# Altium PCB STM32F103RET6.PcbDoc
Units mm, origin at the board's own origin, x right, y up, seen from the top; angles counter-clockwise.
Board outline 50.2 x 95.7 mm, 2 copper layers (Top Layer, Bottom Layer); 61 components, 81 nets, 286 pads, 113 vias.
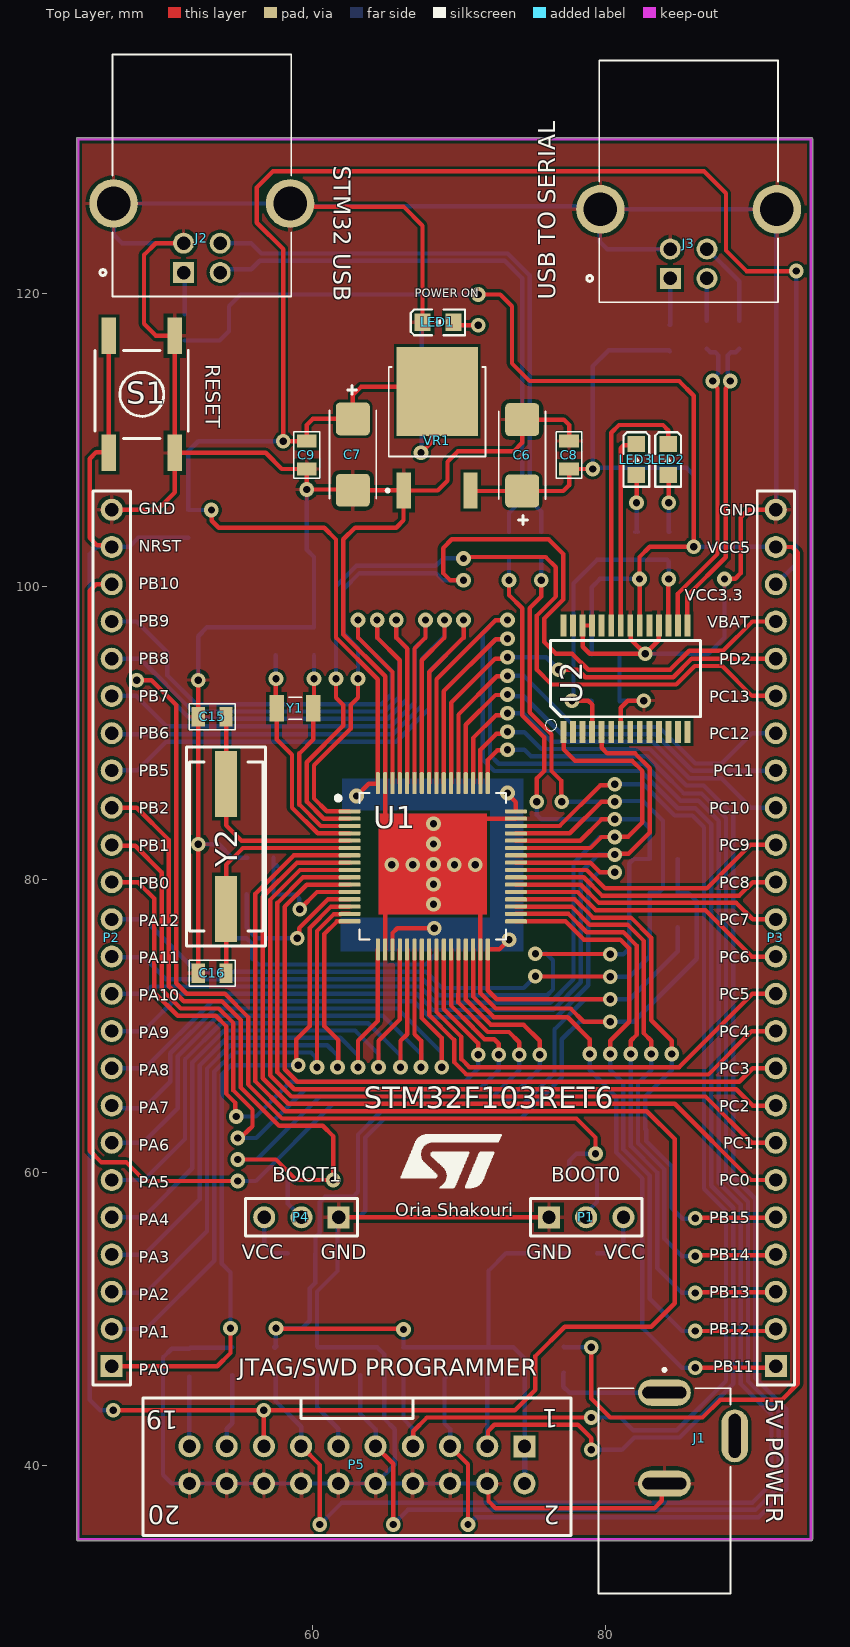
[diagram p0: Top Layer view]
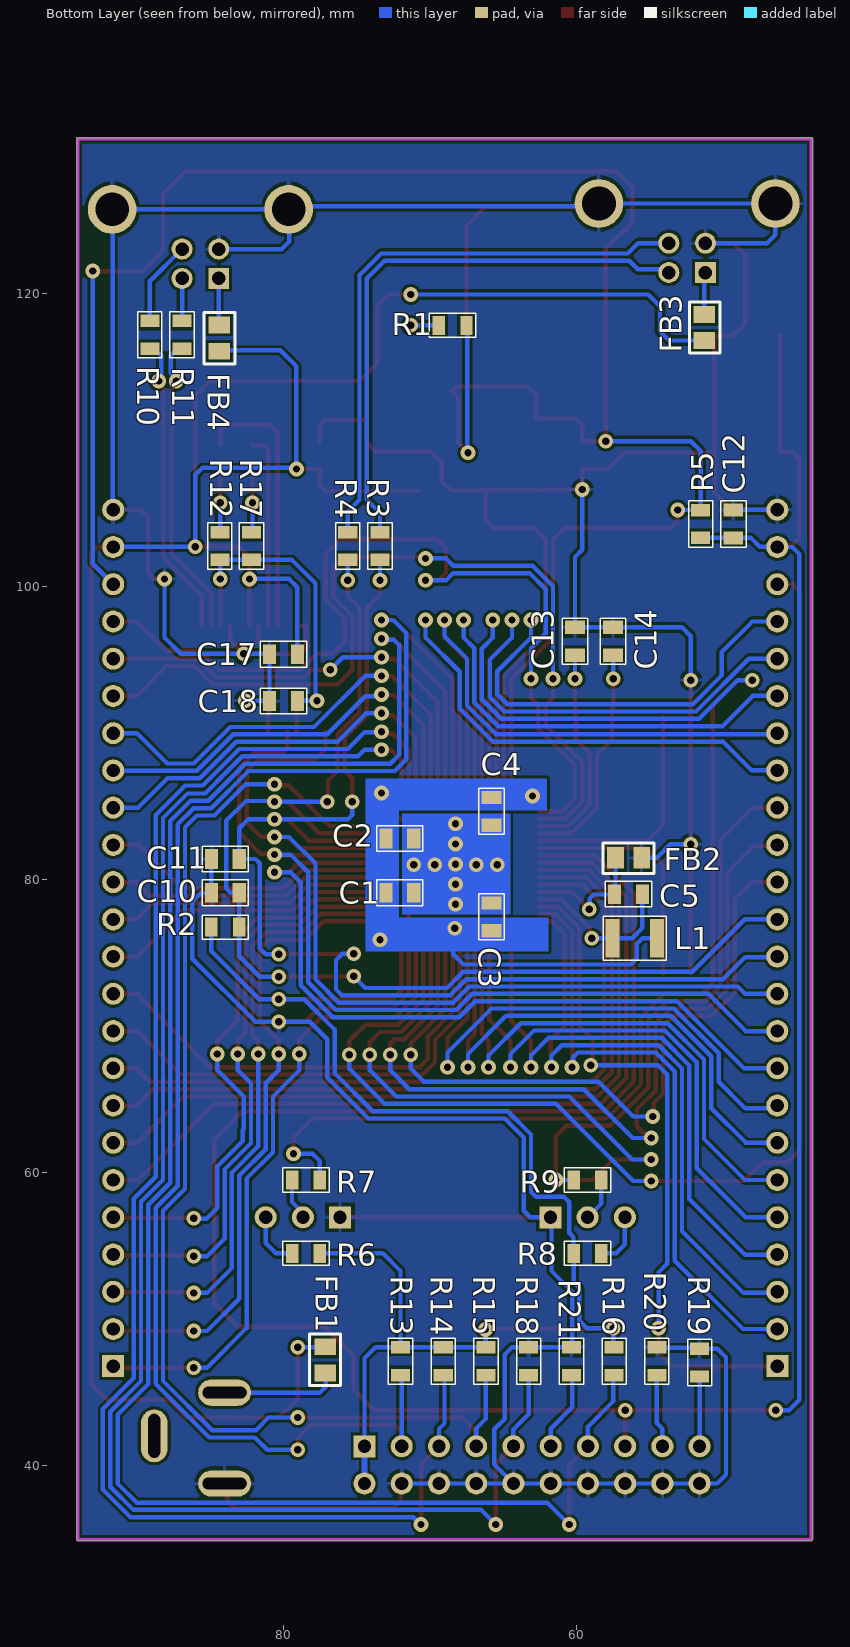
[diagram p1: Bottom Layer view, seen from below]

## Layer stack, top to bottom
Top Solder: solder mask 0.0102, Solder Resist, Dk 3.5
Top Layer: signal copper 0.0356
Dielectric 1: dielectric 0.32, FR-4, Dk 4.8
Bottom Layer: signal copper 0.0356
Bottom Solder: solder mask 0.0102, Solder Resist, Dk 3.5

## Board outline
43.9,35 43.9,130.5 cw(c44,130.5) 44,130.6 94,130.6 cw(c94,130.5) 94.1,130.5 94.1,35 cw(c94,35) 94,34.9 44.003,34.9 cw(c44,35)

## Design rules (kind name [scope] priority, off if disabled: settings)
Clearance [All] p1: gap=0.2 ignorepadtopadclearanceinfootprint=FALSE
DiffPairsRouting [All] p1: maxlimit=0.254 minlimit=0.2 mostfreqgap=0.2 toplayer_minwidth=0.3 toplayer_maxwidth=0.3 toplayer_prefwidth=0.3 bottomlayer_minwidth=0.3 bottomlayer_maxwidth=0.3 bottomlayer_prefwidth=0.3 maxuncoupledlength=12.7
PolygonConnect [All] p1: connectstyle=Relief reliefconductorwidth=0.254 reliefentries=4 polygonreliefangle="90 Angle" airgapwidth=0.254
RoutingVias [All] p1: holewidth=0.5 width=1 viastyle="Through Hole" minholewidth=0.5 minwidth=1 maxholewidth=0.5 maxwidth=1
SolderMaskExpansion [All] p1: expansion=0.102 istentingtop=FALSE
Width [All] p1: maxlimit=1 minlimit=0.3 preferedwidth=0.5
29 further rules are at their usual default settings.

## Classes and differential pairs
differential pair D: +D_P -D_N

## Components (designator, comment, footprint, x,y, rotation, side; value= is the part's Value field where it differs from the comment)
C1 "100nF" CAP0805 65.736,81.76 r0 bottom
C2 "100nF" CAP0805 65.736,85.46 r0 bottom
C3 "100nF" CAP0805 68.46,83.764 r270 bottom
C4 "100nF" CAP0805 63.14,78.336 r90 bottom
C5 "100nF" CAP0805 62.764,76.34 r180 bottom
C6 "47uF" CAP_TANTALIUM_SIZEC 74.046,109.316 r90 top
C7 "47uF" CAP_TANTALIUM_SIZEC 63,108.6 r270 top
C8 "100nF" CAP0805 74.84,115.264 r270 top
C9 "100nF" CAP0805 62.26,102.636 r90 top
C10 "47pF" CAP0805 90.264,76.44 r180 bottom
C11 "47pF" CAP0805 90.264,78.74 r180 bottom
C12 "100nF" CAP0805 51.96,110.564 r270 bottom
C13 "18pF" CAP0805 57.44,89.936 r90 bottom
C14 "18pF" CAP0805 54.84,89.936 r90 bottom
C15 "18pF" CAP0805 59.464,93.76 r180 top
C16 "18pF" CAP0805 59.464,76.26 r180 top
C17 "100nF" CAP0805 86.301,92.705 r180 bottom
C18 "100nF" CAP0805 86.301,89.505 r180 bottom
FB1 "Ferrite Bead" ferritebead_0805 77,47.489 r90 bottom value=10mH
FB2 "Ferrite Bead" ferritebead_0805 56.7,81.6 r0 bottom value=10mH
FB3 "Ferrite Bead" ferritebead_0805 51.4,117.4 r270 bottom value=10mH
FB4 "Ferrite Bead" ferritebead_0805 84.5,116.675 r270 bottom value=10mH
J1 "PJ-035C" PJ-035C 82.349,42.714 r0 top
J2 "UJ2-BH-4-TH" "USB_TYPE B_2.0" 52.47,128.893 r180 top
J3 "UJ2-BH-4-TH" "USB_TYPE B_2.0" 85.67,128.493 r180 top
L1 "10uH" IND1210 52.889,79.082 r0 bottom
LED1 "LED_SMD_0805" LED_SMD_0805 71.267,117.459 r0 top
LED2 "LED_SMD_0805" LED_SMD_0805 83.709,105.929 r270 top
LED3 "LED_SMD_0805" LED_SMD_0805 81.547,105.929 r270 top
P1 "BOOT0" "Header 3" 58.213,40.069 r0 top
P2 "Header 24" HEADER24 46.3,79.693 r0 top
P3 "Header 24" HEADER24 91.599,79.693 r0 top
P4 "BOOT1" "Header 3" 79.687,73.851 r180 top
P5 "IDC 10X2" "IDC 10X2" 147.612,87.06 r180 top
R1 "1K" RES0805 72.137,115.487 r180 bottom
R2 "1.5K" RES0805 87.637,74.437 r180 bottom
R3 "22" RES0805 71.087,99.063 r90 bottom
R4 "22" RES0805 77.913,106.437 r270 bottom
R5 "10K" RES0805 49.212,100.563 r90 bottom
R6 "100" RES0805 74.763,56.813 r0 bottom
R7 "10K" RES0805 74.763,61.813 r0 bottom
R8 "100" RES0805 62.937,52.187 r180 bottom
R9 "10K" RES0805 62.937,57.187 r180 bottom
R10 "22" RES0805 91.413,120.837 r270 bottom
R11 "22" RES0805 89.213,120.837 r270 bottom
R12 "270" RES0805 82.016,99.063 r90 bottom
R13 "10K" RES0805 74.313,50.837 r270 bottom
R14 "10K" RES0805 71.399,50.837 r270 bottom
R15 "10K" RES0805 68.484,50.837 r270 bottom
R16 "10K" RES0805 59.742,50.837 r270 bottom
R17 "270" RES0805 79.854,99.063 r90 bottom
R18 "10K" RES0805 60.944,43.463 r90 bottom
R19 "10K" RES0805 49.287,43.363 r90 bottom
R20 "10K" RES0805 52.201,43.463 r90 bottom
R21 "10K" RES0805 58.03,43.463 r90 bottom
S1 "RESET" "Push Button Switch SMD" 21.045,141.563 r270 top
U1 "STM32F103RET6" QFP50P1200X1200X160-64N 68.2,80.9 r0 top
U2 "INTERFACE-FT232RL(SSOP28)" FT232RL 80.837,93.065 r0 top
VR1 "LD1117DT33TR" LD1117DT33TR 68.5,108.534 r0 top
Y1 "32768" 32768_crystal 58.9,91.618 r0 top
Y2 "12MHz" "Crystal SMD" 58.649,73.637 r90 top

## Footprints (in the part's own frame and the unit in brackets; to place one, negate y for a bottom-side part, rotate by r counter-clockwise, add the part's x,y. Pads: shape width x height; smd on the part's side, far side on the other; paste and mask are expansions set on the pad)
32768_crystal [mm]
  rect 1x1.8 smd: 1(-1.346,0.058) 2(1.154,0.058)
  silkscreen extent -0.53,-0.69 0.33,0.81, body extent -1.7,-0.69 1.5,0.81, height 0.65
CAP0805 [mm]
  rect 0.9x1.35 smd: 1(5.364,2.66) 2(7.264,2.66)
  silkscreen extent 4.74,1.79 7.89,3.53, body extent 5.29,2.01 7.34,3.31, height 0.5
CAP_TANTALIUM_SIZEC [mm]
  rrect25% 2.24x2.32 smd: 1(-2.816,-0.254) 2(2.054,-0.254)
  silkscreen extent -5.1,-1.85 2.62,1.35, body extent -3.4,-1.8 2.6,1.4, height 2.8
"Crystal SMD" [mm]
  rect 4.5x1.5 smd: 1(4.363,4.549) 2(12.863,4.549)
  silkscreen extent 1.81,1.85 15.41,7.25, body extent 2.4,2.3 14.7,6.8, height 5.18
ferritebead_0805 [mm]
  rect 1.14x1.47 smd: 1(-1.144,0.127) 2(0.636,0.127)
  silkscreen extent -2,-0.9 1.5,1.2, body extent -1.2,-0.53 0.8,0.72, height 1.05
FT232RL [mm]
  rect 0.4x1.5 smd: 1(-3.717,-2.99) 2(-3.067,-2.99) 3(-2.417,-2.99) 4(-1.767,-2.99) 5(-1.117,-2.99) 6(-0.467,-2.99) 7(0.183,-2.99) 8(0.833,-2.99) 9(1.483,-2.99) 10(2.133,-2.99) 11(2.783,-2.99) 12(3.433,-2.99) 13(4.083,-2.99) 14(4.733,-2.99) 15(4.733,4.26) 16(4.083,4.26) 17(3.433,4.26) 18(2.783,4.26) 19(2.133,4.26) 20(1.483,4.26) 21(0.833,4.26) 22(0.183,4.26) 23(-0.467,4.26) 24(-1.117,4.26) 25(-1.767,4.26) 26(-2.417,4.26) 27(-3.067,4.26) 28(-3.717,4.26)
  silkscreen extent -4.95,-2.92 5.61,3.23, body extent -4.59,-3.26 5.61,4.53, height 2
HEADER24 [mm]
  rect 1.5x1.5 hole 0.9: 1(0,-32.893)
  round 1.5 hole 0.9: 2(0,-30.353) 3(0,-27.813) 4(0,-25.273) 5(0,-22.733) 6(0,-20.193) 7(0,-17.653) 8(0,-15.113) 9(0,-12.573) 10(0,-10.033) 11(0,-7.493) 12(0,-4.953) 13(0,-2.413) 14(0,0.127) 15(0,2.667) 16(0,5.207) 17(0,7.747) 18(0,10.287) 19(0,12.827) 20(0,15.367) 21(0,17.907) 22(0,20.447) 23(0,22.987) 24(0,25.527)
  silkscreen extent -1.27,-34.16 1.27,26.8, body extent -1.27,-34.29 1.27,26.67, height 8.38
"Header 3" [mm]
  rect 1.5x1.5 hole 0.9: 1(17.907,16.891)
  round 1.5 hole 0.9: 2(20.447,16.891) 3(22.987,16.891)
  silkscreen extent 16.64,15.62 24.26,18.16, body extent 16.64,15.62 24.26,18.16, height 8.38
"IDC 10X2" [mm]
  rect 1.5x1.5 hole 0.9: 1(73.152,45.72)
  round 1.5 hole 0.9: 2(73.152,48.26) 3(75.692,45.72) 4(75.692,48.26) 5(78.232,45.72) 6(78.232,48.26) 7(80.772,45.72) 8(80.772,48.26) 9(83.312,45.72) 10(83.312,48.26) 11(85.852,45.72) 12(85.852,48.26) 13(88.392,45.72) 14(88.392,48.26) 15(90.932,45.72) 16(90.932,48.26) 17(93.472,45.72) 18(93.472,48.26) 19(96.012,45.72) 20(96.012,48.26)
  silkscreen extent 69.98,42.42 99.19,51.82, body extent 69.98,42.44 99.19,51.82, height 9.27
IND1210 [mm]
  rect 0.97x2.62 smd: 1(1.611,3.082) 2(4.651,3.082)
  silkscreen extent 0.98,1.58 5.28,4.58, body extent 1.51,1.81 4.76,4.36, height 0.55
LD1117DT33TR [mm]
  rect 0.97x2.44 smd: 1(-2.28,-2.004) 3(2.28,-2.004)
  rect 5.55x6.07 smd paste-4: 4(0,4.766)
  silkscreen extent -3.48,-2.11 3.3,6.42, body extent -3.25,-2.58 3.25,7.14, height 2.17
LED_SMD_0805 [mm]
  rect 1.1x1.2 smd: 1(-3.767,0.541) 2(-1.667,0.541)
  silkscreen extent -4.57,-0.34 -0.86,1.42, body extent -3.72,-0.08 -1.72,1.17, height 0.7
PJ-035C [mm]
  oval 3.6x1.8 hole 0.8 slot 3 at 0 deg: 1(1.651,2.286) 2(1.651,-3.914)
  oval 1.8x3.6 hole 0.8 slot 3 at 90 deg: 3(6.451,-0.664)
  silkscreen extent -2.85,-11.41 6.15,3.94, body extent -2.82,-11.38 6.63,2.67, height 11
"Push Button Switch SMD" [mm]
  rect 2.5x1 smd: 1(24.479,29.555) 1(32.463,29.555) 2(24.479,25.055) 2(32.463,25.055)
  silkscreen extent 25.47,24.1 31.47,30.48, body extent 23.97,24.3 32.97,30.3, height 5
QFP50P1200X1200X160-64N [mm]
  rrect50% 1.49x0.28 smd: 1(-5.67,3.75) 2(-5.67,3.25) 3(-5.67,2.75) 4(-5.67,2.25) 5(-5.67,1.75) 6(-5.67,1.25) 7(-5.67,0.75) 8(-5.67,0.25) 9(-5.67,-0.25) 10(-5.67,-0.75) 11(-5.67,-1.25) 12(-5.67,-1.75) 13(-5.67,-2.25) 14(-5.67,-2.75) 15(-5.67,-3.25) 16(-5.67,-3.75) 33(5.67,-3.75) 34(5.67,-3.25) 35(5.67,-2.75) 36(5.67,-2.25) 37(5.67,-1.75) 38(5.67,-1.25) 39(5.67,-0.75) 40(5.67,-0.25) 41(5.67,0.25) 42(5.67,0.75) 43(5.67,1.25) 44(5.67,1.75) 45(5.67,2.25) 46(5.67,2.75) 47(5.67,3.25) 48(5.67,3.75)
  rrect50% 0.28x1.49 smd: 17(-3.75,-5.67) 18(-3.25,-5.67) 19(-2.75,-5.67) 20(-2.25,-5.67) 21(-1.75,-5.67) 22(-1.25,-5.67) 23(-0.75,-5.67) 24(-0.25,-5.67) 25(0.25,-5.67) 26(0.75,-5.67) 27(1.25,-5.67) 28(1.75,-5.67) 29(2.25,-5.67) 30(2.75,-5.67) 31(3.25,-5.67) 32(3.75,-5.67) 49(3.75,5.67) 50(3.25,5.67) 51(2.75,5.67) 52(2.25,5.67) 53(1.75,5.67) 54(1.25,5.67) 55(0.75,5.67) 56(0.25,5.67) 57(-0.25,5.67) 58(-0.75,5.67) 59(-1.25,5.67) 60(-1.75,5.67) 61(-2.25,5.67) 62(-2.75,5.67) 63(-3.25,5.67) 64(-3.75,5.67)
  silkscreen extent -6.6,-5 5,5, body extent -6,-6 6,6, height 1.6
RES0805 [mm]
  rect 0.85x1.3 smd: 1(2.737,2.313) 2(4.637,2.313)
  silkscreen extent 2.11,1.49 5.26,3.14, body extent 2.66,1.66 4.71,2.96, height 0.5
"USB_TYPE B_2.0" [mm]
  rect 1.428x1.428 / inner round 1.428 / far side rect 1.428x1.428 hole 0.92: 1(1.27,7.493)
  round 1.428 hole 0.92: 2(-1.23,7.493) 3(-1.23,5.493) 4(1.27,5.493)
  round 3.316 hole 2.3: SH1(-6,2.783) SH2(6.04,2.783)
  silkscreen extent -6.08,-7.38 6.97,9.12, body extent -7.37,-7.33 7.63,9.12, height 11

## Part data
C1 C2 C3 C4 C5 C8 C9 C10 C11 C12 C13 C14 C15 C16 C17 C18: library part CAP0805, "CAP0805"
C6 C7: library part "Cap Pol1", "Polarized Capacitor (Radial)", LatestRevisionDate=17-Jul-2002, LatestRevisionNote="Re-released for DXP Platform.", PackageReference=RB7.6-15, Published=8-Jun-2000, Publisher="Altium Limited"
FB1 FB2 FB3 FB4 L1: library part Inductor, "Inductor", Code_IEC=1005, Code_JEITA=0402, LatestRevisionDate=29-May-2009, LatestRevisionNote="IPC-7351 Footprint Added.", PackageDescription="Chip Inductor", PackageReference=0402-A, Published=8-Jun-2000, Publisher="Altium Limited"
J1: Package=None, Availability=Unavailable, MF="{'manufacturer': u'CUI Devices'}", MP=PJ-035C, Price=None
J2 J3: "Type B, USB 2.0, 1 A, Right Angle, Through Hole, USB Receptacle", Package=None, Availability="In Stock", Check_prices=https://www.snapeda.com/parts/UJ2-BH-4-TH/CUI+Devices/view-part/?ref=eda, CUI_purchase_URL=https://www.cuidevices.com/product/interconnect/connectors/usb-connectors/uj2-bh-th-series?utm_source=snapeda.com&utm_medium=referral&utm_campaign=snapedaBOM, MF="CUI Devices", MP=UJ2-BH-4-TH, Price=None, Purchase-URL=https://pricing.snapeda.com/search/part/UJ2-BH-4-TH/?ref=eda, SnapEDA_Link=https://www.snapeda.com/parts/UJ2-BH-4-TH/CUI+Devices/view-part/?ref=snap
P1 P4: library part "Header 3"
P2 P3: "Header, 24-Pin", LatestRevisionDate=17-Jul-2002, LatestRevisionNote="Re-released for DXP Platform.", Publisher="Altium Limited"
R1 R2 R3 R4 R5 R6 R7 R8 R9 R10 R11 R12 R13 R14 R15 R16 R17 R18 R19 R20 R21: library part RES0805, "RES0805"
S1: library part SW-PB, "Switch", LatestRevisionDate=17-Jul-2002, LatestRevisionNote="Re-released for DXP Platform.", PackageReference=SPST-2, Published=24-Mar-1999, Publisher="Altium Limited"
U1: "ARMÂ® CortexÂ®-M3 STM32F1 Microcontroller IC 32-Bit 72MHz 512KB (512K x 8) FLASH 64-LQFP (10x10)", Package="LQFP-64 STMicroelectronics", Check_prices=https://www.snapeda.com/parts/STM32F103RET6/STMicroelectronics/view-part/?ref=eda, MF=STMicroelectronics, MP=STM32F103RET6, SnapEDA_Link=https://www.snapeda.com/parts/STM32F103RET6/STMicroelectronics/view-part/?ref=snap
U2: "USB-Ð¼Ð¾ÑÑ‚, Ð¸Ð½Ñ‚ÐµÑ€Ñ„ÐµÐ¹Ñ USB Ðº UART USB 2.0 UART 28-SSOP", Package="SSOP-28 FTDI", Availability="Not in stock", Check_prices=https://www.snapeda.com/parts/FT232RL/FTDI%252C+Future+Technology+Devices+International+Ltd/view-part/?ref=eda, MF="FTDI, Future", MP=FT232RL, Price=None, SnapEDA_Link=https://www.snapeda.com/parts/FT232RL/FTDI%252C+Future+Technology+Devices+International+Ltd/view-part/?ref=snap
VR1: "Linear Voltage Regulator IC 1 Output 800mA DPAK", Package="TO-252 STMicroelectronics", Availability=Unavailable, MF=STMicroelectronics, MP=LD1117DT33TR, Price=None, SnapEDA_Link=https://www.snapeda.com/parts/LD1117DT33TR/STMicroelectronics/view-part/8105/?ref=snap
Y1 Y2: library part "Crystal SMD", "Crystal SMD"

## Via types
v1: diameter 1, hole 0.5, Top Layer to Bottom Layer, 113 vias

## Nets (pads, with @x,y where several pads share a name; then routed paths per layer and width w, separated by ;. In a path a pad name is that pad's centre, name@x,y a point inside that pad or via, vN(x,y) a via of type N, cw(c..) or ccw(c..) an arc to the next point about the centre after c; other vN are vias at no path point)
AGND: C5.1 FB2.2 U1.12 | length 9
  Top Layer w0.3: v1(59.126,77.974) 60.302,79.15 U1.12
  Bottom Layer w0.3: FB2.2 57.336,79.064 57.424,78.976 58.824,78.976 59.104,78.696 59.104,77.996 v1(59.126,77.974) ; FB2.2@57.536,80.973 FB2.2@57.6,80.909
AVCC3.3: C5.2 L1.2 U1.13 | length 11
  Top Layer w0.3: v1(58.95,76) 59.084,76.134 59.084,76.684 61.05,78.65 U1.13
  Bottom Layer w0.3: C5.2 55.5,76.7 56.2,76 L1.2 v1(58.95,76)
BOOT0: R7.1 U1.60 | length 99.7
  Top Layer w0.3: v1(48,93.6) 49,93.6 50.7,91.9 50.7,72.921 51.421,72.2 54.021,72.2 55.6,70.621 55.6,66.021 57.921,63.7 78,63.7 79.3,62.4 v1(79.3,61.3) ; v1(65.7,97.7) 65.7,96.5 66.45,95.75 U1.60
  Bottom Layer w0.3: v1(48,93.6) 49,93.6 51.643,90.957 65.136,90.957 66.465,92.287 66.465,95.735 65.7,96.5 v1(65.7,97.7) ; R7.1 77.5,60.8 78,61.3 v1(79.3,61.3)
BOOT1: P2.16 R9.1 U1.28 | length 76.7
  Top Layer w0.3: P2.16 48,84.9 50.2,82.7 50.2,72.714 51.214,71.7 53.814,71.7 55.1,70.414 55.1,65.814 57.714,63.2 60.7,63.2 61.4,62.5 v1(61.4,59.5) 58.9,59.5 57.5,60.9 v1(54.9,60.9) ; U1.28 69.95,72.2 69.95,71.607 71.957,69.6 73.4,69.6 74.1,68.9 v1(74.1,68.05)
  Bottom Layer w0.3: v1(54.9,60.9) 56.2,60.9 60.5,65.2 72.3,65.2 74.1,67 v1(74.1,68.05) ; R9.1 v1(61.4,59.5)
D_N: R11.2 U2.16 | length 20.8
  Top Layer w0.3: U2.16 84.92,98.101 84.92,99.503 87.623,102.206 87.623,113.509 87.3,113.833 v1(87.3,114)
  Bottom Layer w0.3: R11.2 87.134,115.965 87.459,115.965 87.682,115.742 87.682,114.55 87.3,114.168 v1(87.3,114)
D_P: R10.2 U2.15 | length 20.7
  Top Layer w0.3: U2.15 85.57,99.37 88.177,101.977 88.177,113.51 88.5,113.833 v1(88.5,114)
  Bottom Layer w0.3: v1(88.5,114) 88.382,114.118 88.382,114.469 88.317,114.533 88.317,115.742 88.541,115.965 88.865,115.965 R10.2
GND: C1.1 C2.1 C3.1 C4.1 C6.2 C7.2 C8.1 C9.1 C10.1 C11.1 C12.1 C13.2 C14.2 C15.2 C16.2 C17.1 C18.1 FB2.1 J1.2 J2.4 J2.SH1 J2.SH2 J3.4 J3.SH1 J3.SH2 LED1.1 P1.1 P2.24 P3.24 P4.1 P5.4 P5.6 P5.8 P5.10 P5.12 P5.14 P5.16 P5.18 P5.20 R18.2 R19.2 R20.2 R21.2 S1.1 U1.18 U1.31 U1.47 U1.63 U2.7 U2.18 U2.21 U2.25 U2.26 VR1.1 | length 435.5
  Top Layer w0.3: P2.24 49.42,105.22 50.6,106.4 S1.1@50.6,109.1 ; J2.4 49.3,123.4 48.5,122.6 48.5,117.9 49.315,117.085 50.6,117.085 S1.1@50.6,109.1 ; C16.2 v1(52.2,82.4) C15.2 v1(52.2,93.6) ; J2.SH1 58.68,125.9 66.2,125.9 67.5,124.6 LED1.1 ; v1@59.622,106.578 v1(59.6,106.6) ; P4.1 P1.1 ; U1.18 64.95,77.75 65.5,78.3 v1(68.25,78.3) 70.9,78.3 71.45,77.75 U1.31 71.45,72.243 72.493,71.2 77.598,71.2 78.498,70.3 v1(80.3,70.3) ; VR1.1 68.53,106.53 69.2,107.2 69.2,108.5 69.9,109.2 73.7,109.2 74.3,109.8 C6.2 77.13,111.37 77.5,111 C8.1 ; P5.4 72,38.72 72,37.6 72.5,37.1 83.3,37.1 83.826,37.626 83.826,38.626 J1.2 ; U1.47 68.6,84.15 v1(68.25,83.8) 65.5,83.8 64.95,84.35 U1.63 64.95,93.858 62.1,96.708 62.1,103.2 62.9,104 65.7,104 66.204,104.504 66.204,106.546 C7.2 62.692,106.6 v1(59.6,106.6) ; U2.25 U2.26 78.42,95.88 78.9,95.4 v1@82.683,95.4 ; U2.7 81.02,91.72 81.5,92.2 v1(82.6,92.2) ; U2.21 81.707,97.288 81.707,96.376 v1@82.683,95.4 ; U2.18 83.62,96.32 v1(82.7,95.4) v1@82.683,95.4 ; v1(88.1,100.5) 88.122,100.522 88.822,100.522 89.2,100.9 89.2,104.7 89.72,105.22 P3.24 ; S1.1@50.6,109.1 56.8,109.1 57.9,108 C9.1 v1(59.6,106.6)
  Bottom Layer w0.3: P2.24 49.28,105.22 C12.1 ; J2.4 47,123.4 46.43,123.97 J2.SH2 J2.SH1 58.67,125.91 79.43,125.91 J3.SH2 ; v1(52.2,82.4) 53.6,82.4 54.527,81.473 FB2.1 ; v1(52.2,93.6) 52.2,96.6 52.8,97.2 C14.2 C13.2 60.1,102 59.6,102.5 v1(59.6,106.6) ; R20.2 54.464,48.05 51.65,48.05 R19.2 50.4,48 49.8,47.4 49.8,39.4 50.4,38.8 P5.20 P5.18 P5.16 P5.14 P5.12 P5.10 ; P5.4 P5.6 P5.8 P5.10 ; v1(82.6,92.2) 80.972,92.2 C18.1 C17.1 80.972,95.4 v1(82.7,95.4) 87,95.4 88.1,96.5 v1(88.1,100.5) ; J1.2@83.952,38.752 J1.2 ; J3.4 80.1,123 79.6,123.5 79.6,125.68 J3.SH2 ; C11.1 C10.1 84.924,79.076 85.624,79.076 86.2,78.5 86.2,74.6 81.9,70.3 v1(80.3,70.3) 78.2,70.3 77,69.1 77,66.5 74.2,63.7 64.9,63.7 63.6,62.4 63.6,57.4 63.16,56.96 P4.1 61.7,56.88 61.7,53.293 60.3,51.893 60.3,48.143 R21.2 R18.2 64.4,48.1 64.9,47.6 64.9,43.2 65.6,42.5 65.6,40.1 P5.10 ; P3.24 91.635,105.255 91.635,125.675 J3.SH1 J3.SH2
  Bottom Layer w0.381: P2.24 P2.24@46.46,105.06
  other v1: 68.25,79.675 65.4,81 66.825,81 69.675,81 71.1,81 68.25,81.05 68.25,82.425
JNTRST: P5.3 R13.2 U1.56 | length 106.4
  Top Layer w0.3: U1.56 68.45,93.65 72.478,97.678 73.278,97.678 v1(73.3,97.7) ; P5.3 71.964,41.384 71.964,42.364 72.4,42.8 78.1,42.8 79,41.9 v1(79,41.1)
  Bottom Layer w0.3: P5.3 R13.2@71.92,46.12 ; v1(73.3,97.7) 72.5,97.7 71.6,96.8 71.6,88.2 72.4,87.4 82.379,87.4 84.913,84.866 86.113,84.866 87.2,83.779 87.2,59.107 88.7,57.607 88.7,45.593 85.045,41.938 81.938,41.938 81.1,41.1 v1(79,41.1)
  Bottom Layer w0.381: R13.2@71.92,46.12 R13.2
JTCK/SWCLK: P5.9 R18.1 U1.49 | length 105.6
  Top Layer w0.3: P5.9 65.5,40.14 v1(65.5,36) ; U1.49 71.95,88.15 72.603,88.803 73.253,88.803 v1(73.3,88.85)
  Bottom Layer w0.3: R18.1 63.257,43.543 64.3,42.5 P5.9 ; v1(65.5,36) 66.5,37 90.212,37 91.8,38.588 91.8,43.693 89.7,45.793 89.7,58.021 88.2,59.521 88.2,84.193 86.527,85.866 85.327,85.866 83.745,87.448 82.793,88.4 74.9,88.4 74.45,88.85 v1(73.3,88.85)
JTDI: P5.5 R14.2 U1.50 | length 103.5
  Top Layer w0.3: P5.5 70.6,40.12 v1(70.6,36) ; U1.50 71.45,88.85 72.537,89.937 73.166,89.937 v1(73.3,90.071)
  Bottom Layer w0.3: R14.2 69.086,46.051 69,45.966 69,42.9 69.38,42.52 P5.5 ; v1(70.6,36) 70.626,36 71.126,36.5 90.419,36.5 92.3,38.381 92.3,43.9 90.2,46 90.2,58.228 88.7,59.728 88.7,81.025 88.7,84.4 86.689,86.411 85.489,86.411 84.245,87.655 83,88.9 75.6,88.9 74.45,90.05 73.321,90.05 v1(73.3,90.071)
JTDO: P5.13 R16.2 U1.55 | length 128.6
  Top Layer w0.3: P5.13 60.5,40.06 v1(60.5,36) ; U1.55 68.95,92.85 72.493,96.393 73.264,96.393 v1(73.3,96.429)
  Bottom Layer w0.3: R16.2 57.5,46.129 57.5,44.4 59.22,42.68 P5.13 ; v1(60.5,36) 62,37.5 90,37.5 91.3,38.8 91.3,43.486 89.2,45.586 89.2,57.814 87.7,59.314 87.7,83.986 86.32,85.366 85.12,85.366 83.245,87.241 82.586,87.9 72.698,87.9 72.1,88.498 72.1,96 72.443,96.343 73.214,96.343 v1(73.3,96.429)
JTMS/SWDIO: P5.7 R15.2 U1.46 | length 83.3
  Top Layer w0.3: P5.7 66.864,41.364 66.864,42.364 67.8,43.3 v1(79,43.3) ; U1.46 76.85,83.65 79.635,86.435 80.535,86.435 v1(80.6,86.5)
  Bottom Layer w0.3: R15.2 66.2,46.171 66.2,43.2 66.84,42.56 P5.7 ; v1(79,43.3) 81,43.3 81.862,42.438 84.838,42.438 88.2,45.8 88.2,57.4 86.7,58.9 86.7,83.572 85.905,84.366 84.705,84.366 82.572,86.5 v1(80.6,86.5)
NetFB1_1: FB1.1 J1.1 | length 8
  Bottom Layer w0.3: FB1.1 77.1,46.318 77.1,45.4 77.5,45 J1.1
NetFB3_1: FB3.1 J2.1 | length 2.9
  Bottom Layer w0.3: J2.1 51.273,121.327 FB3.1
NetFB4_1: FB4.1 J3.1 | length 3.2
  Bottom Layer w0.3: FB4.1 84.4,117.846 J3.1
NetJ2_2: J2.2 R3.2 | length 39.1
  Bottom Layer w0.3: J2.2 53.916,121.616 55.816,121.616 56.4,122.2 73.1,122.2 74.3,121 74.3,105.9 73.4,105 R3.2
NetJ2_3: J2.3 R4.1 | length 39.8
  Bottom Layer w0.3: J2.3 55.8,123.4 56.5,122.7 73.307,122.7 74.8,121.207 74.8,105.9 75.6,105.1 R4.1
NetJ3_2: J3.2 R11.1 | length 2.9
  Bottom Layer w0.3: R11.1 J3.2
NetJ3_3: J3.3 R10.1 | length 5.8
  Bottom Layer w0.3: J3.3 89.1,120.8 R10.1
NetLED1_2: LED1.2 R1.1 | length 3.7
  Top Layer w0.3: LED1.2 69.8,117.8 v1(71.3,117.8)
  Bottom Layer w0.3: R1.1 v1(71.3,117.8)
NetLED2_1: LED2.1 U2.23 | length 18.3
  Top Layer w0.3: U2.23 80.37,110.47 80.9,111 83.9,111 84.25,110.65 LED2.1
NetLED2_2: LED2.2 R12.2 | length 4
  Top Layer w0.3: LED2.2@84.2,107.546 LED2.2 84.3,107.546 v1(84.3,105.7)
  Bottom Layer w0.3: v1(84.3,105.7) 84.3,103.729 R12.2
NetLED3_1: LED3.1 U2.22 | length 13.3
  Top Layer w0.3: U2.22 81.02,109.417 81.213,109.611 82.002,109.611 LED3.1
NetLED3_2: LED3.2 R17.2 | length 4.1
  Top Layer w0.3: LED3.2@82,107.508 LED3.2 82.1,107.584 v1(82.1,105.7)
  Bottom Layer w0.3: v1(82.1,105.7) 82.1,103.767 R17.2
NetP1_2: P1.2 R7.2 | length 2.8
  Bottom Layer w0.3: P1.2 78.66,57.263 79.4,58.003 R7.2
NetP1_3: P1.3 R6.2 | length 3.8
  Bottom Layer w0.3: R6.2 80.5,54.5 81.2,55.2 P1.3
NetP4_2: P4.2 R9.2 | length 2.9
  Bottom Layer w0.3: R9.2 58.3,57.9 P4.2
NetP4_3: P4.3 R8.2 | length 3.7
  Bottom Layer w0.3: P4.3 56.7,55.1 57.3,54.5 R8.2
NRST: C12.2 P2.23 P5.15 R5.1 S1.2 U1.7 | length 190.3
  Top Layer w0.3: S1.2@46.1,117.085 46.1,109.1 46.048,109.152 45.252,109.152 44.8,108.7 44.8,103.3 45.311,102.789 46.191,102.789 P2.23 ; v1(46.4,43.794) v1(56.675,43.794) 56.68,43.789 P5.15 ; v1@56.7,43.8 73.8,43.8 75.2,45.2 75.2,47.5 77.2,49.5 83.1,49.5 84.7,51.1 84.7,62.3 82.8,64.2 58.128,64.2 56.1,66.228 56.1,79.021 58.729,81.65 U1.7
  Bottom Layer w0.3: P2.23@46.3,102.676 45.276,102.676 44.8,102.2 44.8,44.5 45.506,43.794 v1(46.4,43.794) ; P2.23 46.32,102.7 47.5,102.7 48.1,103.3 C12.2 R5.1
OSC32_IN: C13.1 U1.3 Y1.2 | length 14.6
  Top Layer w0.3: v1(60.1,93.7) 60.1,91.723 Y1.2 60.054,89.554 59.1,88.6 59.1,85.107 60.557,83.65 U1.3
  Bottom Layer w0.3: v1(60.1,93.7) C13.1
OSC32_OUT: C14.1 U1.4 Y1.1 | length 15.5
  Top Layer w0.3: v1(57.5,93.7) 57.5,91.73 Y1.1 57.554,89.546 58.6,88.5 58.6,84.9 60.35,83.15 U1.4
  Bottom Layer w0.3: v1(57.5,93.7) C14.1
OSC_IN: C15.1 U1.5 Y2.2 | length 16.3
  Top Layer w0.3: C15.1 Y2.2 54.1,83.7 55.15,82.65 U1.5
OSC_OUT: C16.1 U1.6 Y2.1 | length 16.3
  Top Layer w0.3: C16.1 Y2.1 54.1,81 55.25,82.15 U1.6
PA0: P2.1 U1.14 | length 46.3
  Top Layer w0.3: P2.1 53.5,46.8 54.4,47.7 v1(54.4,49.4) ; v1(59.029,67.329) 58.9,67.459 58.9,69.1 59.8,70 59.8,76.693 61.257,78.15 U1.14
  Bottom Layer w0.3: v1(54.4,49.4) 54.4,53.2 53.8,53.8 53.8,66.693 54.437,67.329 v1(59.029,67.329)
PA1: P2.2 U1.15 | length 42.1
  Top Layer w0.3: v1(60.3,67.2) 60.3,76.486 61.454,77.64 61.935,77.64 61.945,77.65 U1.15
  Bottom Layer w0.3: P2.2 48.64,49.34 53.3,54 53.3,66.9 54.6,68.2 59.9,68.2 60.228,67.872 60.228,67.272 v1(60.3,67.2)
PA2: P2.3 U1.16 | length 41.6
  Top Layer w0.3: v1(61.7,67.2) 61.755,67.255 61.755,69.045 60.8,70 60.8,76.279 61.661,77.14 62.52,77.14 U1.16
  Bottom Layer w0.3: P2.3 46.38,51.8 48.6,51.8 52.8,56 52.8,67.107 54.393,68.7 54.957,68.7 61,68.7 61.7,68 v1(61.7,67.2)
PA3: P2.4 U1.17 | length 38.2
  Top Layer w0.3: v1(63.1,67.2) 63.1,69 64.45,70.35 U1.17
  Bottom Layer w0.3: P2.4 46.32,54.4 48.5,54.4 52.3,58.2 52.3,67.314 54.186,69.2 54.75,69.2 61.9,69.2 63.1,68 v1(63.1,67.2)
PA4: P2.5 U1.20 | length 37.9
  Top Layer w0.3: v1(64.5,67.2) 64.5,69 65.95,70.45 U1.20
  Bottom Layer w0.3: P2.5 48.46,56.96 51.8,60.3 51.8,67.521 53.979,69.7 54.543,69.7 62.9,69.7 64.5,68.1 v1(64.5,67.2)
PA5: P2.6 U1.21 | length 37.2
  Top Layer w0.3: v1(66,67.2) 66,69 66.45,69.45 U1.21
  Bottom Layer w0.3: P2.6 48.5,59.5 51.3,62.3 51.3,67.728 53.772,70.2 54.336,70.2 63.8,70.2 66,68 v1(66,67.2)
PA6: P2.7 U1.22 | length 37
  Top Layer w0.3: U1.22 66.95,69.45 67.4,69 v1(67.4,67.2)
  Bottom Layer w0.3: P2.7 48.44,62.04 50.8,64.4 50.8,67.936 53.564,70.7 54.128,70.7 64.8,70.7 67.4,68.1 v1(67.4,67.2)
PA7: P2.8 U1.23 | length 37.4
  Top Layer w0.3: U1.23 67.45,70.55 68.8,69.2 v1(68.8,67.2)
  Bottom Layer w0.3: P2.8 46.48,64.4 48.5,64.4 50.3,66.2 50.3,68.143 53.357,71.2 53.921,71.2 65.8,71.2 68.8,68.2 v1(68.8,67.2)
PA8: P2.9 U1.41 | length 51.9
  Top Layer w0.3: U1.41 78.95,81.15 79.602,80.498 v1(80.602,80.498)
  Bottom Layer w0.3: P2.9 48.57,67.12 53.15,71.7 66.9,71.7 68,70.6 76.621,70.6 78.8,72.779 78.8,73.886 78.8,79.8 79.498,80.498 v1(80.602,80.498)
PA9: P2.10 U1.42 U2.5 | length 63.7
  Top Layer w0.3: U1.42 80.552,81.65 80.653,81.751 81.551,81.751 83,83.2 83,87.6 82,88.6 80.1,88.6 79.72,88.98 U2.5
  Bottom Layer w0.3: P2.10 48.46,69.66 51,72.2 67.107,72.2 68.207,71.1 76.414,71.1 78.3,72.986 78.3,74.093 78.3,80.5 79.499,81.699 v1(80.601,81.699)
PA10: P2.11 U1.43 U2.1 | length 64.3
  Top Layer w0.3: U1.43 78.95,82.15 79.7,82.9 80.789,82.9 80.811,82.922 81.522,82.922 82.5,83.9 82.5,87.393 81.793,88.1 77.9,88.1 77.12,88.88 U2.1
  Bottom Layer w0.3: P2.11 48.5,72.2 49,72.7 67.314,72.7 68.414,71.6 76.207,71.6 77.8,73.193 77.8,81.1 79.6,82.9 v1(80.6,82.9)
PA11: C11.2 P2.12 R3.1 U1.44 | length 84.7
  Top Layer w0.3: v1(73.4,100.4) 73.4,99.4 74.3,98.5 74.3,91.193 75.8,89.693 75.8,87.4 75.3,86.9 v1(75.3,85.3) ; U1.44 78.25,82.65 79.7,84.1 v1(80.6,84.1) ; v1(75.2,74.933) 75.217,74.917 80.283,74.917 v1(80.3,74.9)
  Bottom Layer w0.3: P2.12 46.34,74.7 48.5,74.7 50,73.2 67.521,73.2 68.621,72.1 76,72.1 76.4,72.5 76.4,74.5 75.967,74.933 v1(75.2,74.933) ; v1(73.4,100.4) R3.1 ; v1(75.3,85.3) 75.3,84.4 75.6,84.1 v1(80.6,84.1) 82.4,84.1 83,83.5 C11.2 81.9,81.4 81.6,81.1 81.6,75.3 81.2,74.9 v1(80.3,74.9)
PA12: C10.2 P2.13 R2.2 R4.2 U1.45 | length 82.4
  Top Layer w0.3: U1.45 77.55,83.15 79.7,85.3 v1(80.6,85.3) ; v1(75.2,73.4) 75.217,73.383 80.283,73.383 v1(80.3,73.367) ; v1(75.6,100.4) 75.6,99.3 74.8,98.5 74.8,91.4 76.3,89.9 76.3,87.4 76.95,86.75 76.95,85.35 v1(77,85.3)
  Bottom Layer w0.3: P2.13 48.52,77.28 52.1,73.7 67.728,73.7 68.828,72.6 74.4,72.6 v1(75.2,73.4) ; v1(75.6,100.4) R4.2 ; v1(77,85.3) v1(80.6,85.3) 80.656,85.356 82.544,85.356 83.9,84 83.9,79.4 83.6,79.1 C10.2 R2.2 83,74.756 81.611,73.367 v1(80.3,73.367)
PB0: P2.14 U1.26 | length 49
  Top Layer w0.3: P2.14 46.32,79.8 48.1,79.8 49.2,78.7 49.2,72.893 49.2,72.3 50.8,70.7 51.393,70.7 53.4,70.7 54.1,70 54.1,65.4 54.717,64.783 54.717,63.917 v1(54.8,63.833) ; U1.26 68.95,71.171 71.3,68.821 v1(71.3,68.05)
  Bottom Layer w0.3: v1(54.8,63.833) 56.133,63.833 58.5,66.2 70.4,66.2 71.3,67.1 v1(71.3,68.05)
PB1: P2.15 U1.27 | length 56.6
  Top Layer w0.3: P2.15 46.36,82.3 47.9,82.3 49.7,80.5 49.7,73.1 49.7,72.507 51.007,71.2 51.6,71.2 52.593,71.2 53.607,71.2 54.6,70.207 54.6,69.193 54.6,65.607 55.9,64.307 55.9,63.17 55.724,62.994 55.717,62.994 55.089,62.367 v1(54.9,62.367) ; U1.27 69.45,72.6 69.45,71.4 70.964,69.886 70.964,69.864 71.728,69.1 72.4,69.1 72.7,68.8 v1(72.7,68.05)
  Bottom Layer w0.3: v1(54.9,62.367) 56.167,62.367 59.5,65.7 71.4,65.7 72.7,67 v1(72.7,68.05)
PB5: P2.17 U1.57 | length 42.5
  Top Layer w0.3: U1.57 67.95,94.15 70.3,96.5 v1(70.3,97.7)
  Bottom Layer w0.3: P2.17 48.04,87.44 50,89.4 65.7,89.4 67.965,91.665 67.965,94.165 70.3,96.5 v1(70.3,97.7)
PB6: P2.18 U1.58 | length 40.3
  Top Layer w0.3: U1.58 67.45,89 67.45,94.95 69,96.5 v1(69,97.7)
  Bottom Layer w0.3: P2.18 46.38,89.9 65.493,89.9 67.465,91.872 67.465,95.065 69,96.6 v1(69,97.7)
PB7: P2.19 U1.59 | length 39.6
  Top Layer w0.3: U1.59 66.95,95.75 67.7,96.5 v1(67.7,97.7)
  Bottom Layer w0.3: P2.19 47.98,92.52 50.043,90.457 65.343,90.457 66.965,92.08 66.965,95.765 67.7,96.5 v1(67.7,97.7)
PB8: P2.20 U1.61 | length 39.2
  Top Layer w0.3: v1(64.4,97.7) 64.4,96.5 65.95,94.95 U1.61
  Bottom Layer w0.3: P2.20 48.247,95.06 51.85,91.457 64.929,91.457 65.9,92.428 65.9,95 64.4,96.5 v1(64.4,97.7)
PB9: P2.21 U1.62 | length 40.8
  Top Layer w0.3: v1(63.1,97.7) 63.1,96.5 65.45,94.15 U1.62
  Bottom Layer w0.3: P2.21 48,97.6 50.1,95.5 50.1,93.914 52.057,91.957 64.722,91.957 65.4,92.636 65.4,94.2 63.1,96.5 v1(63.1,97.7)
PB10: P2.22 U1.29 | length 86.1
  Top Layer w0.3: P2.22 45.24,100.14 44.8,99.7 44.8,61.5 45.6,60.7 47.3,60.7 48.567,59.433 v1(54.9,59.433) ; U1.29 70.45,71.814 72.164,70.1 74.393,70.1 75.493,69 75.493,68.057 v1(75.5,68.05)
  Bottom Layer w0.3: v1(54.9,59.433) 56.133,59.433 61.4,64.7 73.093,64.7 75.493,67.1 75.493,68.043 v1(75.5,68.05)
PB11: P3.1 U1.30 | length 43.8
  Top Layer w0.3: U1.30 70.95,72.021 72.371,70.6 77.4,70.6 78.91,69.09 78.91,68.11 v1(78.9,68.1) ; v1(86.1,46.7) 91.499,46.7 P3.1
  Bottom Layer w0.3: v1(78.9,68.1) 78.9,67 80.7,65.2 80.7,61.4 82.5,59.6 82.5,49.4 85.2,46.7 v1(86.1,46.7)
PB12: P3.2 U1.33 | length 43.7
  Top Layer w0.3: U1.33 77.25,77.15 78.5,75.9 80.993,75.9 81.6,75.293 81.6,70.3 80.3,69 v1(80.3,68.1) ; v1(86.1,49.2) 91.459,49.2 P3.2
  Bottom Layer w0.3: v1(80.3,68.1) 80.3,67 81.2,66.1 81.2,61.607 83,59.807 83,51.4 85.2,49.2 v1(86.1,49.2) ; P3.2@91.559,49.3 P3.2
PB13: P3.3 U1.34 | length 40.9
  Top Layer w0.3: U1.34 77.457,77.65 78.707,76.4 81.2,76.4 82.1,75.5 82.1,69.4 81.7,69 v1(81.7,68.1) ; v1(86.1,51.8) 86.14,51.84 91.559,51.84 P3.3
  Bottom Layer w0.3: v1(81.7,68.1) 81.7,61.814 83.5,60.014 83.5,53.5 85.2,51.8 v1(86.1,51.8) ; P3.3@91.579,51.9 P3.3
PB14: P3.4 U1.35 | length 39.5
  Top Layer w0.3: U1.35 77.664,78.15 78.914,76.9 81.507,76.9 82.6,75.807 82.6,69.5 83.1,69 v1(83.1,68.1) ; v1(86.1,54.3) 86.16,54.36 91.539,54.36 P3.4
  Bottom Layer w0.3: v1(83.1,68.1) 83.1,67 82.2,66.1 82.2,62.021 84,60.221 84,55.5 85.2,54.3 v1(86.1,54.3) ; P3.4@91.579,54.4 P3.4
PB15: P3.5 U1.36 | length 38.3
  Top Layer w0.3: U1.36 77.871,78.65 79.121,77.4 81.714,77.4 83.1,76.014 83.1,70.4 84.5,69 v1(84.5,68.1) ; v1(86.1,56.9) 86.13,56.93 91.569,56.93 P3.5
  Bottom Layer w0.3: v1(84.5,68.1) 84.5,67 82.7,65.2 82.7,62.982 82.764,62.918 82.764,62.164 84.5,60.428 84.5,57.6 85.236,56.864 86.064,56.864 v1(86.1,56.9) ; P3.5@91.559,57 P3.5
PC0: P3.6 U1.8 | length 57.1
  Top Layer w0.3: U1.8 58.936,81.15 56.6,78.814 56.6,66.436 58.336,64.7 84.7,64.7 89.9,59.5 P3.6
PC1: P3.7 U1.9 | length 54.6
  Top Layer w0.3: U1.9 59.143,80.65 57.1,78.607 57.1,66.643 58.543,65.2 86.8,65.2 89.96,62.04 P3.7
PC2: P3.8 U1.10 | length 52.1
  Top Layer w0.3: U1.10 59.35,80.15 57.6,78.4 57.6,66.85 58.75,65.7 88.9,65.7 90.02,64.58 P3.8
PC3: P3.9 U1.11 | length 50.4
  Top Layer w0.3: U1.11 59.6,79.65 58.1,78.15 58.1,67.057 58.957,66.2 89.1,66.2 90.02,67.12 P3.9
PC4: P3.10 U1.24 | length 31.9
  Top Layer w0.3: U1.24 67.95,70.757 69.65,69.057 69.65,67.543 70.493,66.7 87,66.7 89.96,69.66 P3.10
PC5: P3.11 U1.25 | length 31.9
  Top Layer w0.3: U1.25 68.45,70.964 70.15,69.264 70.15,67.75 70.7,67.2 85,67.2 90,72.2 P3.11
PC6: P3.12 U1.37 | length 19.6
  Top Layer w0.3: U1.37 78.078,79.15 79.328,77.9 86.8,77.9 89.96,74.74 P3.12
PC7: P3.13 U1.38 | length 18.7
  Top Layer w0.3: U1.38 78.286,79.65 79.536,78.4 88.9,78.4 90.02,77.28 P3.13
PC8: P3.14 U1.39 | length 18.6
  Top Layer w0.3: U1.39 78.493,80.15 79.743,78.9 89.1,78.9 90.02,79.82 P3.14
PC9: P3.15 U1.40 | length 19.5
  Top Layer w0.3: U1.40 78.7,80.65 79.95,79.4 86.9,79.4 89.86,82.36 P3.15
PC10: P3.16 U1.51 | length 27.1
  Top Layer w0.3: U1.51 70.95,89.65 72.509,91.209 73.166,91.209 v1(73.3,91.343)
  Bottom Layer w0.3: v1(73.3,91.343) 74.357,91.343 76.3,89.4 83.207,89.4 85.696,86.911 87.889,86.911 89.9,84.9 P3.16
PC11: P3.17 U1.52 | length 28.2
  Top Layer w0.3: U1.52 70.45,90.55 72.485,92.585 73.271,92.585 v1(73.3,92.614)
  Bottom Layer w0.3: v1(73.3,92.614) 73.414,92.5 74.4,92.5 77,89.9 83.414,89.9 85.904,87.411 91.57,87.411 P3.17
PC12: P3.18 U1.53 | length 30.8
  Top Layer w0.3: U1.53 69.95,91.25 72.571,93.871 73.285,93.871 v1(73.3,93.886)
  Bottom Layer w0.3: v1(73.3,93.886) 74.414,93.886 77.9,90.4 83.621,90.4 86.111,87.911 87.911,87.911 89.98,89.98 P3.18
PC13: P3.19 U1.2 | length 61.1
  Top Layer w0.3: v1(61.6,93.7) 61.6,92.4 62.1,91.9 62.1,90.5 59.6,88 59.6,85.314 60.764,84.15 U1.2 ; v1(70.3,101.9) 70.4,102 75.893,102 76.6,101.293 76.6,99.307 75.3,98.007 75.3,94.3 76.3,93.3 84.8,93.3 86.06,94.56 87.94,94.56 89.98,92.52 P3.19
  Bottom Layer w0.3: v1(61.6,93.7) 61.6,100.007 62.993,101.4 68.4,101.4 68.9,101.9 v1@70.274,101.9
PD2: P3.20 U1.54 | length 30
  Top Layer w0.3: U1.54 69.45,92.05 72.45,95.05 73.193,95.05 v1(73.3,95.157) ; v1(76.8,94.3) 78.093,94.3 78.593,93.8 84.593,93.8 85.853,95.06 P3.20
  Bottom Layer w0.3: v1(73.3,95.157) 75.943,95.157 v1(76.8,94.3)
PULL1: P5.11 R21.1 | length 5.5
  Bottom Layer w0.3: R21.1 60.3,46.157 60.3,44 61.76,42.54 P5.11
PULL2: P5.17 R20.1 | length 5
  Bottom Layer w0.3: P5.17 54.14,42.54 54.514,42.914 R20.1
PULL3: P5.19 R19.1 | length 4.8
  Bottom Layer w0.3: P5.19 R19.1
VBAT: P3.21 U1.1 | length 64.3
  Top Layer w0.3: U1.1 60.971,84.65 60.1,85.521 60.1,87.793 62.6,90.293 62.6,91.9 63.1,92.4 v1(63.1,93.7) ; v1(70.3,100.4) 70.278,100.422 69.378,100.422 68.9,100.9 68.9,102.6 69.5,103.2 76.1,103.2 77.1,102.2 77.1,99.1 75.8,97.8 75.8,96.2 76.6,95.4 77.7,95.4 78.8,94.3 84.386,94.3 85.686,95.6 88,95.6 90,97.6 P3.21
  Bottom Layer w0.3: v1(63.1,93.7) 63.1,95.793 62.1,96.793 62.1,99.8 63.2,100.9 68.4,100.9 68.9,100.4 v1(70.3,100.4)
VCC3.3: C1.2 C2.2 C3.2 C4.2 C7.1 C9.2 L1.1 P3.22 P5.1 P5.2 R1.2 R2.1 R5.2 R6.1 R8.1 R13.1 R14.1 R15.1 R16.1 U1.19 U1.32 U1.48 U1.64 VR1.4 | length 274.9
  Top Layer w0.3: v1(53.1,105.2) 53.122,105.178 53.122,104.478 53.6,104 60.793,104 61.6,103.193 61.6,96.5 64.45,93.65 64.45,86.546 64.44,86.536 63.836,86.536 v1(63,85.7) ; v1(57.5,49.4) 57.55,49.35 66.15,49.35 v1(66.2,49.3) ; U1.19 65.45,76.35 65.77,76.67 v1(68.292,76.67) ; v1(67.4,109.1) 68.072,109.772 68.072,112.872 VR1.4 68.2,113.6 63.3,113.6 62.746,113.046 C7.1 60.016,111.416 59.6,111 C9.2 v1(58,109.9) 58,123 56.2,124.8 56.2,127.2 57.3,128.3 86.7,128.3 88.2,126.8 88.2,122.9 89.6,121.5 v1(93,121.5) ; v1(73.3,85.9) 73.3,85.83 73.87,85.26 U1.48 ; v1(73.4,75.9) 73.397,75.9 72.727,75.23 U1.32 71.95,72.45 72.567,71.833 v1(80.3,71.833)
  Bottom Layer w0.3: v1(53.1,105.2) R5.2 51.525,109.225 52.2,109.9 v1(58,109.9) ; L1.1 55.493,76 55.896,75.596 55.896,74.604 56.3,74.2 67.7,74.2 68.4,74.9 68.4,76.562 v1(68.292,76.67) ; R16.1@57.5,48.171 v1(57.5,49.4) 59.3,49.4 59.8,49.9 59.8,52.1 60.176,52.476 60.176,54.476 R8.1 60.2,55.6 60.5,55.9 60.5,58 60.85,58.35 62.75,58.35 63.1,58.7 63.1,62.607 64.693,64.2 73.9,64.2 76.5,66.8 76.5,69.772 78.562,71.833 v1(80.3,71.833) 81.633,71.833 84.9,75.1 R2.1 ; v1(66.2,49.3) 66.2,48.129 R15.1 R14.1 R13.1 ; v1(67.4,109.1) 67.45,109.15 67.45,117.75 R1.2 ; P5.1 74.46,47.34 73.7,48.1 R13.1 ; R6.1 73.2,54.5 72,53.3 R13.1 ; P3.22 93,101.541 v1(93,121.5)
  Bottom Layer w0.381: R16.1 R16.1@57.5,48.171 ; P5.2 P5.1
VCC5: C6.1 C8.2 C17.2 FB1.2 FB3.2 FB4.2 P3.23 U2.20 VR1.3 | length 188.8
  Top Layer w0.3: VR1.3 70.81,106.5 C6.1 77.1,106.5 77.5,106.9 C8.2 v1(79.1,108) ; v1(71.3,119.9) 72.8,119.9 73.6,119.1 73.6,115.2 74.8,114 85,114 86,113 v1(86,102.7) 83,102.7 82.3,102 v1(82.3,100.5) 82.31,100.49 82.31,97.335 U2.20 ; v1(79,48.1) 79,44.6 80.3,43.3 86.6,43.3 87.8,44.5 92,44.5 93.1,45.6 93.1,102.3 92.72,102.68 P3.23
  Bottom Layer w0.3: FB3.2 53.664,116.764 54.3,117.4 54.3,119.1 55.1,119.9 v1(71.3,119.9) v1@71.5,119.9 ; FB1.2 77.152,48.1 v1(79,48.1) ; C17.2@79,95.402 C17.2 79.037,99.937 79.6,100.5 v1(82.3,100.5) ; FB4.2 84.312,116.1 80.2,116.1 79.1,115 v1(79.1,108) 79.176,108.076 85.524,108.076 86,107.6 v1(86,102.7) 86.01,102.69 91.589,102.69 P3.23
VCCIO: C18.2 R12.1 R17.1 U2.4 U2.17 | length 24.3
  Top Layer w0.3: v1(77.7,92.2) 78.8,92.2 79.07,91.93 U2.4 ; U2.17 84.27,100.47 v1(84.3,100.5)
  Bottom Layer w0.3: C18.2 79.002,92.2 v1(77.7,92.2) 77.8,92.3 77.8,100.2 79.4,101.8 R17.1 84.2,101.8 84.3,101.7 v1(84.3,100.5)
pads on no net: J1.3 U2.2 U2.3 U2.6 U2.8 U2.9 U2.10 U2.11 U2.12 U2.13 U2.14 U2.19 U2.24 U2.27 U2.28

## Polygon pours and split planes (outlines as drawn)
GND on Top Layer "GND_L01_P000" (solid, remove dead copper, pour order 0): 44,130.5 94,130.5 94,35 44,35
GND on Bottom Layer "GND_L02_P001" (solid, remove dead copper, pour order 1): 44,130.5 94,130.5 94,35 44,35

## Keep-outs
Keep-Out Layer:
  lines w0.2: 44,35 94,35 94,130.5 44,130.5 44,35

## Other copper
Top Layer:
  rectangle net GND: 64.5,77.6 71.9,84.5
  text "R" at 26.802,90.1 h15
Bottom Layer:
  rectangle net VCC3.3: 62,84.7 74.4,86.9
  rectangle net VCC3.3: 61.9,75.1 72.9,77.4
  rectangle net VCC3.3: 72.1,75.1 74.4,85.4
  rectangle net GND: 64.5,77.6 71.9,84.5
  text "R" at 35.998,69.8 h15

## Silkscreen, mask and mechanical layers (free items; w line width, h text height)
Top Overlay:
  drawing of 311 lines, arcs and shapes, not listed
  text "STM32 USB" at 61.028,128.671 h2 r270
  text "USB TO SERIAL" at 76.972,119.529 h2 r90
  text "POWER ON" at 66.964,119.514 h1
  text "RESET" at 52.7,115.133 h1 r270
  text "GND" at 48.134,104.9 h0.8
  text "GND" at 87.734,104.8 h0.8
  text "NRST" at 48.134,102.348 h0.8
  text "VCC5" at 86.934,102.261 h0.8
  text "PB10" at 48.134,99.796 h0.8
  text "VCC3.3" at 85.401,99 h0.8
  text "PB9" at 48.134,97.243 h0.8
  text "VBAT" at 86.934,97.183 h0.8
  text "PB8" at 48.134,94.691 h0.8
  text "PD2" at 87.734,94.643 h0.8
  text "PB7" at 48.134,92.139 h0.8
  text "PC13" at 87.067,92.104 h0.8
  text "PB6" at 48.134,89.587 h0.8
  text "PC12" at 87.067,89.565 h0.8
  text "PB5" at 48.134,87.035 h0.8
  text "PC11" at 87.334,87.026 h0.8
  text "PB2" at 48.134,84.483 h0.8
  text "PC10" at 87.067,84.487 h0.8
  text "PB1" at 48.134,81.93 h0.8
  text "PC9" at 87.734,81.948 h0.8
  text "PC8" at 87.734,79.409 h0.8
  text "PB0" at 48.134,79.378 h0.8
  text "PC7" at 87.734,76.87 h0.8
  text "PA12" at 48.134,76.826 h0.8
  text "PC6" at 87.734,74.33 h0.8
  text "PA11" at 48.134,74.274 h0.8
  text "PC5" at 87.734,71.791 h0.8
  text "PA10" at 48.134,71.722 h0.8
  text "PC4" at 87.734,69.252 h0.8
  text "PA9" at 48.134,69.17 h0.8
  text "PC3" at 87.734,66.713 h0.8
  text "PA8" at 48.134,66.617 h0.8
  text "PC2" at 87.734,64.174 h0.8
  text "PA7" at 48.134,64.065 h0.8
  text "STM32F103RET6" at 63.484,63.932 h2.5
  text "PC1" at 88,61.635 h0.8
  text "PA6" at 48.134,61.513 h0.8
  text "BOOT1" at 57.234,59.4 h1
  text "BOOT0" at 76.267,59.4 h1
  text "PC0" at 87.734,59.096 h0.8
  text "PA5" at 48.134,58.961 h0.8
  text "Oria Shakouri" at 65.639,56.721 h1.5
  text "PB15" at 87.067,56.557 h0.8
  text "PA4" at 48.134,56.409 h0.8
  text "VCC" at 55.167,54.1 h1
  text "GND" at 60.567,54.1 h1
  text "GND" at 74.567,54.1 h1
  text "VCC" at 79.867,54.1 h1
  text "PB14" at 87.067,54.017 h0.8
  text "PA3" at 48.134,53.857 h0.8
  text "PB13" at 87.067,51.478 h0.8
  text "PA2" at 48.134,51.304 h0.8
  text "PB12" at 87.067,48.939 h0.8
  text "PA1" at 48.134,48.752 h0.8
  text "PB11" at 87.334,46.4 h0.8
  text "PA0" at 48.134,46.2 h0.8
  text "JTAG/SWD PROGRAMMER" at 54.943,45.728 h2
  text "5V POWER" at 90.526,44.619 h2 r270

## Text inside footprints (layer, text, board x,y; h text height)
P5: Top Overlay "20" at 50.965,37.276 h1.27 r180; Top Overlay "19" at 50.838,43.753 h1.27 r180; Top Overlay "1" at 76.746,43.88 h1.27 r180; Top Overlay "2" at 76.873,37.276 h1.27 r180